# Altium PCB STM Dev board.PcbDoc
Units mil, origin at the board's own origin, x right, y up, seen from the top; angles counter-clockwise.
Board outline 1035 x 1495 mil, 2 copper layers (Top Layer, Bottom Layer); 20 components, 22 nets, 83 pads, 8 vias.
Unrouted connection lines stored in the file: 15.
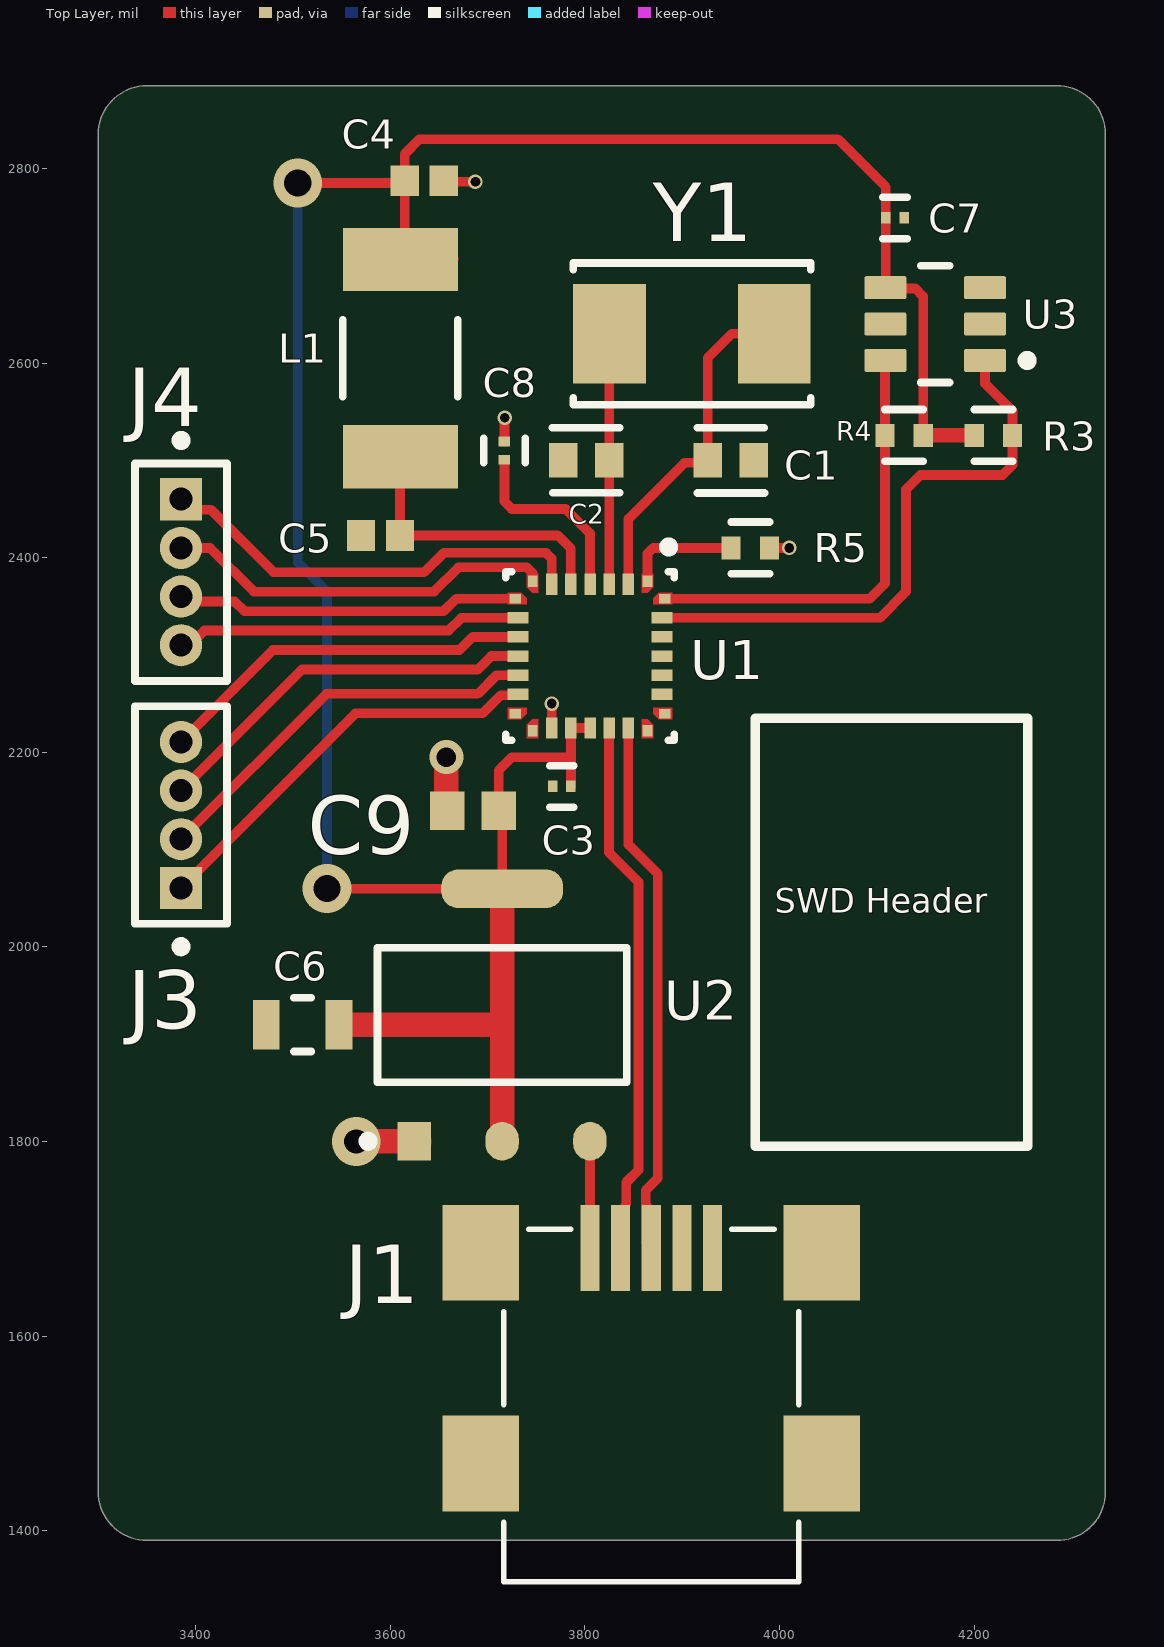
[diagram p0: Top Layer view]
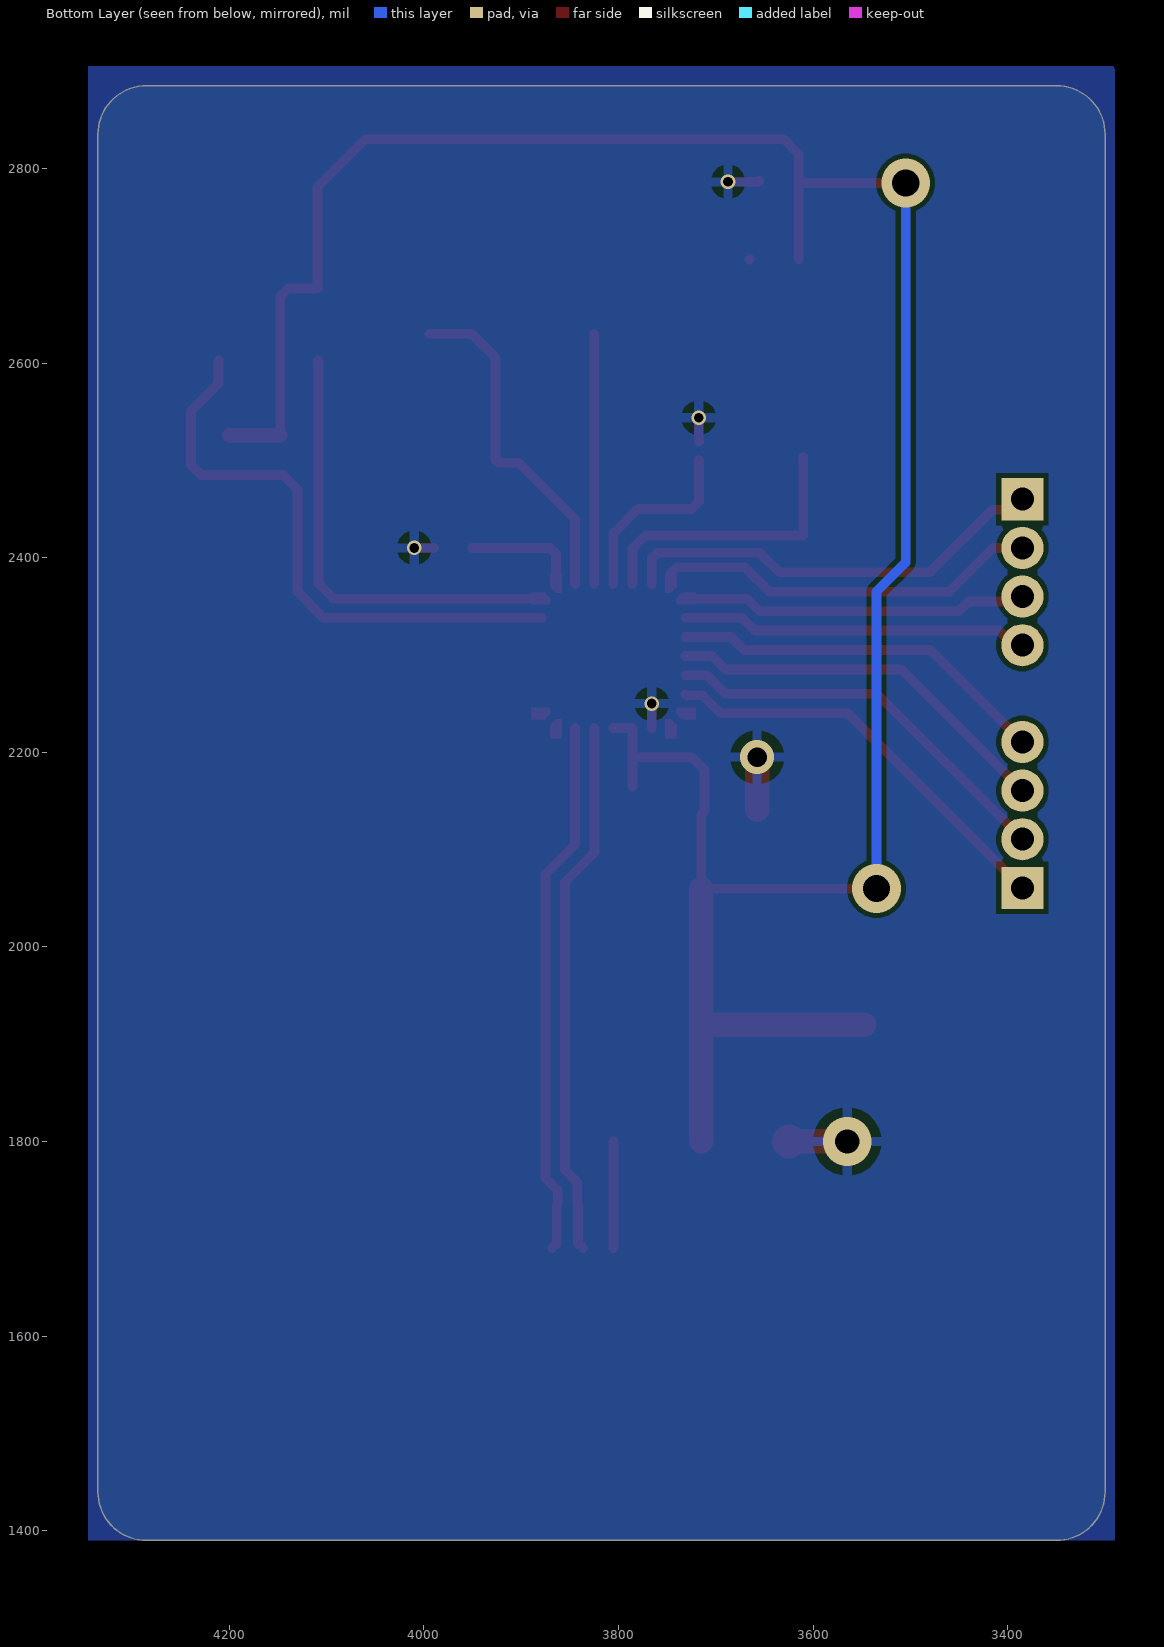
[diagram p1: Bottom Layer view, seen from below]
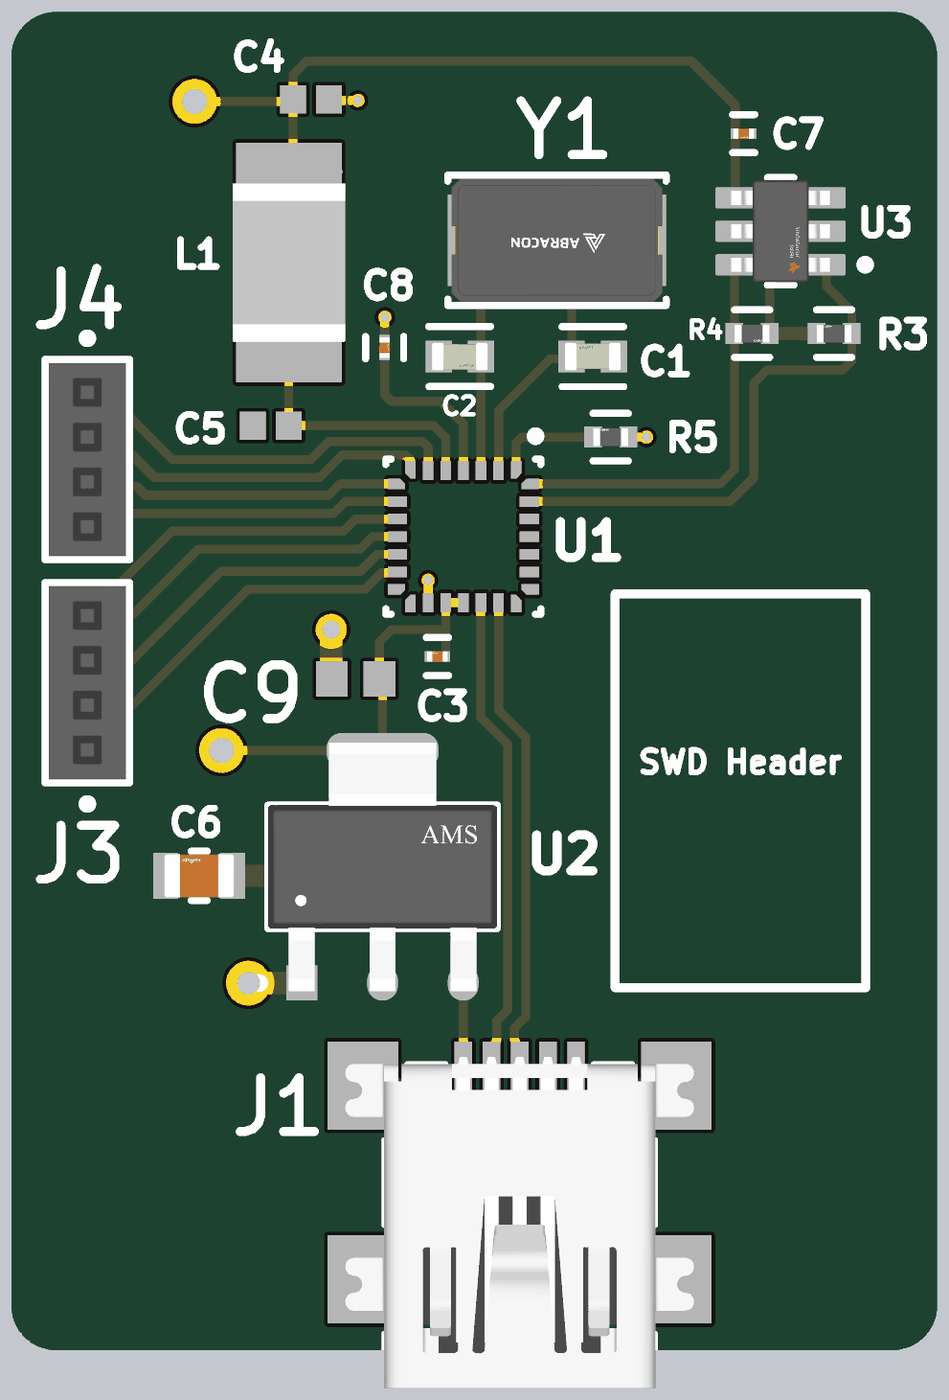
[diagram p2: 3D render of the assembled board from above, using the file's embedded part models]

## Layer stack, top to bottom
Top Solder: solder mask 0.4, Solder Resist, Dk 3.5
Top Layer: signal copper 1.4
Dielectric 1: dielectric 12.6, FR-4, Dk 4.8
Bottom Layer: signal copper 1.4
Bottom Solder: solder mask 0.4, Solder Resist, Dk 3.5

## Board outline
3300,1440 ccw(c3350,1440) 3350,1390 4285,1390 ccw(c4285,1440) 4335,1440 4335,2835 ccw(c4285,2835) 4285,2885 3350,2885 ccw(c3350,2835) 3300,2835

## Design rules (kind name [scope] priority, off if disabled: settings)
Clearance [All] p1: gap=5 ignorepadtopadclearanceinfootprint=TRUE except(10: Arc-Hole Track-Hole SMDPad-Hole THPad-Hole Via-Hole Fill-Hole Poly-Hole Region-Hole Text-Hole)
DiffPairsRouting [All] p1: maxlimit=10 minlimit=6 mostfreqgap=10 toplayer_minwidth=6 toplayer_maxwidth=15 toplayer_prefwidth=15 bottomlayer_minwidth=6 bottomlayer_maxwidth=15 bottomlayer_prefwidth=15 maxuncoupledlength=500
PolygonConnect [All] p1: connectstyle=Relief reliefconductorwidth=10 reliefentries=4 polygonreliefangle="90 Angle" airgapwidth=10
RoutingVias [All] p1: holewidth=28 width=50 viastyle="Through Hole" minholewidth=28 minwidth=50 maxholewidth=28 maxwidth=50
SolderMaskExpansion [All] p1: expansion=4 istentingtop=FALSE
Width [All] p1: maxlimit=40 minlimit=10 preferedwidth=10 minimp=50.000000 maximp=50.000000 favimp=50.000000
29 further rules are at their usual default settings.

## Classes and differential pairs
differential pair USB_D: +USB_D_P -USB_D_N

## Components (designator, comment, footprint, x,y, rotation, side; value= is the part's Value field where it differs from the comment)
C1 "30p" FP-C0603C-CF-MFG 3950,2500 r0 top value="30 pF"
C2 "30p" FP-C0603C-CF-MFG 3801.38,2500 r180 top value="30 pF"
C3 "100n" FP-GRM033-0_03-MFG 3776.33,2164.92 r180 top
C4 "10p" CAPC1006X50X20ML10T10 3635,2787.25 r180 top
C5 "10p" CAPC1006X50X20ML10T10 3590,2422.75 r0 top
C6 "22u" FP-GRM21B-0_15-MFG 3510,1920 r180 top
C7 "100n" FP-GRM033-0_03-MFG 4118.65,2749.06 r0 top
C8 "100n" FP-GRM033-0_03-MFG 3717.34,2510 r90 top
C9 "4u7" CAPC1608X87X35NL15T15 3685,2140 r0 top
J1 "651305142821" 651305142821 3868.27,1528.66 r0 top
J3 "LPPB041NFFN-RC" FP-LPPB041NFFN-RC-MFG 3385,2135.62 r90 top
J4 "LPPB041NFFN-RC" FP-LPPB041NFFN-RC-MFG 3385,2385 r270 top
L1 "120R" SMD-1812 3610.38,2605 r270 top
R3 "5K1" FP-AC0402-MFG 4219.78,2525.66 r180 top
R4 "5K1" FP-AC0402-MFG 4128.01,2525.66 r0 top
R5 "5K1" FP-AC0402-MFG 3970,2410 r180 top
U1 "STM32F042G6U6" STM-UFQFPN28_V 3805.31,2298.82 r270 top
U2 "AMS1117-3.3" FP-AMS1117-IPC_C 3715,1930 r90 top
U3 "TMP100NA/250" FP-DBV0006A-MFG 4160,2640 r180 top
Y1 "32 MHz" FP-ABM7-MFG 3910,2630 r180 top

## Footprints (in the part's own frame and the unit in brackets; to place one, negate y for a bottom-side part, rotate by r counter-clockwise, add the part's x,y. Pads: shape width x height; smd on the part's side, far side on the other; paste and mask are expansions set on the pad)
651305142821 [mm] "Mini USB 2.0 Type AB SMT Horizontal 5 Contacts"
  rect 0.5x2.25 smd: 1(-1.6,4.113) 2(-0.8,4.113) 3(0,4.113) 4(0.8,4.113) 5(1.6,4.113)
  rect 2x2.5 smd: Shell(-4.45,-1.512) Shell(-4.45,3.988) Shell(4.45,-1.512) Shell(4.45,3.988)
  silkscreen extent -3.85,-4.6 3.85,4.6, body extent -4.95,-4.6 4.95,4.8, height 4.1
CAPC1006X50X20ML10T10 [mm] "Chip Capacitor, 2-Leads, Body 1.00x0.55mm, IPC Low Density"
  rect 0.74x0.8 smd: 1(-0.51,0) 2(0.51,0)
  body extent -0.55,-0.33 0.55,0.32, height 0.5
CAPC1608X87X35NL15T15 [mm] "Chip Capacitor, 2-Leads, Body 1.60x0.80mm, IPC Medium Density"
  rect 0.9x1 smd: 1(-0.675,0) 2(0.675,0)
  body extent -0.87,-0.48 0.87,0.47, height 0.87
FP-ABM7-MFG [mm]
  rect 1.9x2.6 smd paste+0 mask+0: 1(-2.15,0) 2(2.15,0)
  silkscreen extent -3.1,-1.85 3.1,1.85, body extent -3.2,-1.95 3.2,1.95, height 0.25
FP-AC0402-MFG [mm]
  rect 0.5x0.6 smd paste+0 mask+0: 1(-0.5,0) 2(0.5,0)
  silkscreen extent -0.5,-0.67 0.5,0.67, body extent -0.85,-0.4 0.85,0.4, height 0.25
FP-AMS1117-IPC_C [mm]
  rect 1.004x0.872 smd paste+0 mask+0: 1(-3.295,2.29)
  rrect100% 1.004x0.872 smd paste+0 mask+0: 2(-3.295,0) 3(-3.295,-2.29)
  rrect87% 1.004x3.182 smd paste+0 mask+0: 4(3.295,0)
  silkscreen extent -3.42,-3.25 1.75,3.62, body extent -3.9,-3.35 3.9,3.35, height 0.25
FP-C0603C-CF-MFG [mm]
  rect 0.75x0.9 smd paste+0 mask+0: 1(-0.6,0) 2(0.6,0)
  silkscreen extent -0.87,-0.85 0.88,0.85, body extent -1.2,-0.6 1.2,0.6, height 0.25
FP-DBV0006A-MFG [mm]
  rrect17% 1.1x0.6 smd paste+0 mask+0: 1(-1.3,0.95) 2(-1.3,0) 3(-1.3,-0.95) 4(1.3,-0.95) 5(1.3,0) 6(1.3,0.95)
  silkscreen extent -2.53,-1.53 0.38,1.53, body extent -1.95,-1.78 1.95,1.78, height 0.25
FP-GRM21B-0_15-MFG [mm]
  rect 0.7x1.3 smd paste+0 mask+0: 1(-0.95,0) 2(0.95,0)
  silkscreen extent -0.23,-0.7 0.23,0.7, body extent -1.4,-0.8 1.4,0.8, height 0.25
FP-GRM033-0_03-MFG [mm]
  rect 0.25x0.3 smd paste+0 mask+0: 1(-0.238,0) 2(0.238,0)
  silkscreen extent -0.32,-0.54 0.32,0.54, body extent -0.46,-0.27 0.46,0.27, height 0.25
FP-LPPB041NFFN-RC-MFG [mm]
  rect 1.1x1.1 hole 0.6 paste-2539.97 mask+0: 1(-1.905,0)
  round 1.1 hole 0.6 paste-2539.97 mask+0: 2(-0.635,0) 3(0.635,0) 4(1.905,0)
  silkscreen extent -3.56,-1.2 2.84,1.2, body extent -2.94,-1.3 2.94,1.3, height 0.25
SMD-1812 [mm] "Chip Inductor, 2-Leads, Body 4.5x3.2mm"
  rect 1.65x3 smd: 1(-2.575,0) 2(2.575,0)
  silkscreen extent -1,-1.5 1,1.5, body extent -2.25,-1.6 2.25,1.6, height 1.49
STM-UFQFPN28_V [mm] "QFN, 28-Leads, Body 4.1x4.1mm, Pitch 0.5mm"
  rect 0.3x0.25 smd: 1(-1.95,1.5) 7(-1.95,-1.5) 15(1.95,-1.5) 21(1.95,1.5)
  rect 0.55x0.3 smd: 2(-1.875,1) 3(-1.875,0.5) 4(-1.875,0) 5(-1.875,-0.5) 6(-1.875,-1) 16(1.875,-1) 17(1.875,-0.5) 18(1.875,0) 19(1.875,0.5) 20(1.875,1)
  rect 0.25x0.3 smd: 8(-1.5,-1.95) 14(1.5,-1.95) 22(1.5,1.95) 28(-1.5,1.95)
  rect 0.3x0.55 smd: 9(-1,-1.875) 10(-0.5,-1.875) 11(0,-1.875) 12(0.5,-1.875) 13(1,-1.875) 23(1,1.875) 24(0.5,1.875) 25(0,1.875) 26(-0.5,1.875) 27(-1,1.875)
  Top Layer region: 1.35,2.15 1.35,1.65 1.505,1.65 1.65,1.795 1.65,2.15
  Top Layer region: 2.15,-1.35 1.65,-1.35 1.65,-1.505 1.795,-1.65 2.15,-1.65
  Top Layer region: -2.15,1.35 -1.65,1.35 -1.65,1.505 -1.795,1.65 -2.15,1.65
  Top Layer region: 2.15,1.35 1.65,1.35 1.65,1.505 1.795,1.65 2.15,1.65
  Top Layer region: 1.35,-2.15 1.35,-1.65 1.505,-1.65 1.65,-1.795 1.65,-2.15
  Top Layer region: -1.35,2.15 -1.35,1.65 -1.505,1.65 -1.65,1.795 -1.65,2.15
  Top Layer region: -1.35,-2.15 -1.35,-1.65 -1.505,-1.65 -1.65,-1.795 -1.65,-2.15
  Top Layer region: -2.15,-1.35 -1.65,-1.35 -1.65,-1.505 -1.795,-1.65 -2.15,-1.65
  silkscreen extent -2.97,-2.2 2.2,2.2, body extent -2.05,-2.05 2.05,2.05, height 0.6

## Part data
C1 C2: library part CMP-1035-00914-3, "CAP CER 30PF 50V 5% NP0 0603", Capacitance="30 pF", Manufacturer=KEMET, Manufacturer Part Number=C0603C300J5GACTU, Package=C0603C-CF, Temperature="-55°C to +125°C", Temperature Characteristic=C0G, Temperature Coefficient=30ppm/°C, Temperature Range High=+125°C, Temperature Range Low=-55°C, Tolerance=0.05, Voltage Rating="50 V", Automotive=Yes, Automotive Grade="Grade 1", Category=Cap, ComponentLink2Description=Datasheet, ComponentLink2URL=https://api.kemet.com/component-edge/download/datasheet/C0603C100J5GACAUTO.pdf, Device Class L1="Passive Components", Device Class L2=Capacitors, Device Class L3="Ceramic Capacitors", Digikey Description="CAP CER 30PF 50V 5% NP0 0603", Height=0.87mm, Lead Free=Yes, Material=Ceramic, Mouser Description="Multilayer Ceramic Capacitors MLCC - SMD/SMT 50volts 30pF C0G 5%", Octopart=https://octopart.com/c0603c300j5gactu-kemet-199455, RoHS=TRUE
C3 C7 C8: library part CMP-06035-000062-2, "Chip Multilayer Ceramic Capacitors for General Purpose, 0201, 0.10uF, X5R, 15%, 10%, 6.3V", Capacitance=100nF, Case Code (Imperial)=0201, Case Code (Metric)=0603, Dielectric=X5R, Max Operating Temperature=85°C, Min Operating Temperature=-55°C, Package Quantity=1, Tolerance=10%, Voltage=6.3V, Case/Package=0201, Depth=0.3mm, Height=0.3mm, Lead Free="Lead Free", Length=0.6mm, Material=Ceramic, Mount="Surface Mount", Packaging="Tape and Reel", Radiation Hardening=No, REACH SVHC="No SVHC", Termination=SMD/SMT, Thickness=0.013inch, Voltage Rating=6.3V, Voltage Rating (DC)=6.3V, Weight=6E-06oz, Width=0.012inch
C4 C5: library part CMP-2008-04829-1, Manufacturer="AVX Interconnect / Elco", Part Number=0402YJ100FBSTR
C6: library part CMP-2007-03385-2, "Chip Multilayer Ceramic Capacitors for General Purpose, 0805, 22uF, X5R, 15%, 20%, 6.3V", Capacitance=22uF, Case Code (Imperial)=0805, Case Code (Metric)=2012, Dielectric=X5R, Max Operating Temperature=85°C, Min Operating Temperature=-55°C, Package Quantity=1, Tolerance=20%, Voltage=6.3V, Case/Package=0805, Depth=1.25mm, Height=1.25mm, Lead Free="Lead Free", Length=2mm, Material=Ceramic, Mount="Surface Mount", Packaging="Tape and Reel", Radiation Hardening=No, REACH SVHC="No SVHC", Termination=SMD/SMT, Thickness=0.053inch, Voltage Rating=6.3V, Voltage Rating (DC)=6.3V, Width=0.049inch
C9: library part CMP-2006-03238-1, Manufacturer=Kemet, Part Number=C0603C475K8PACTU
J1: library part CMP-1502-03247-2, Contact Resistance=20mΩ, Current Rating=1A, Insulation Resistance=1GΩ, Max Operating Temperature=105°C, Min Operating Temperature=-40°C, Operating Supply Voltage=30V, Connector Type=USB, Contact Material=Copper, Contact Plating=Gold, Features=Shielded, Gender=Receptacle, Lead Free="Lead Free", Mount="Horizontal, Surface Mount", NexarPartId=19991175, Number of Contacts=5, Number of Pins=5, Orientation=Horizontal, Packaging="Tape and Reel", REACH SVHC=Unknown, RoHS=Compliant, Termination=SMD/SMT, USB Standard="USB 2.0"
J3 J4: library part CMP-25680-000035-1, "CONN HDR 4POS 0.05 GOLD PCB", Package Quantity=1, Connector Type=Header, Contact Plating=Gold, Contact Type="Female Socket", Lead Free="Lead Free", Mount="Through Hole", Number of Positions=4, Number of Rows=1, Packaging=Bulk, Pitch=0.05inch, RoHS Compliant=Yes, Termination=Solder
L1: library part CMP-0220-00088-1, "SMD EMI Suppression Ferrite Bead WE-CBF, Z = 120 Ohm", ComponentLink1Description="Manufacturer Link", ComponentLink1URL=http://www.we-online.com, ComponentLink2Description=Datasheet, ComponentLink2URL=http://www.we-online.de/katalog/media/pdf/7427925.pdf, DatasheetVersion=Dec-2005, Impedance="120 Ohm", PackageDescription="Chip Inductor, 2-Leads, Body 4.5 x 3.2 mm", PackageReference=SMD-1812, PackageVersion=2010
R3 R4 R5: library part CMP-2002-01829-3, "RES 5.1kΩ ±1% 0.063W 0402", Case Code (Imperial)=0402, Case Code (Metric)=1005, Max Operating Temperature=155°C, Max Power Dissipation=63mW, Min Operating Temperature=-55°C, Resistance=5.1kR, Resistor Type="Thick Film", Temperature Coefficient=100ppm/°C, Tolerance=1%, Case/Package=0402, Depth=0.5mm, Features="Moisture Resistant", Height=0.015inch, Lead Free="Lead Free", Length=0.039inch, Military Standard=Not, Mount="Surface Mount", Number of Terminations=2, Packaging="Cut Tape", Power Rating=63mW, RoHS Compliant=Yes, Series=AC, Size Code=0402, Width=0.02inch
U1: library part CMP-0304-00112-2, "ARM Cortex-M0 32-bit MCU, 32 KB Flash, 6 KB Internal RAM, 24 I/Os, 28-Pin UFQFPN, -40 to 85 degC, Tray", I/Os (High Current)=24, Manufacturer=STMicroelectronics, Operating Frequency(F) (Processor speed) (MHz)=48, Package Description="28-Pin Ultra Thin Fine Pitch Quad Flat No-Lead, 4 x 4 x 0.6 mm Body, 0.5 mm Pitch", Package Reference=UFQFPN28, Supply Voltage(Vcc) min (V)=2, ComponentLink1Description="Manufacturer URL", ComponentLink1URL=http://www.st.com/, ComponentLink2Description=Datasheet, ComponentLink2URL=http://www.st.com/st-web-ui/static/active/en/resource/technical/document/datasheet/DM00105814.pdf, Core="ARM Cortex-M0", DatasheetVersion="Rev. 5", FLASH Size (Prog) (kB)=32, Internal RAM Size (kB)=6, Mounting Technology="Surface Mount", Packing=Tray, PartNumber=STM32F042G6U6
U2: library part CMP-209535-000001-1, "LDO Voltage Regulators 1A, 3.3V", Dropout Voltage=1.1V, Manufacturer="Advanced Monolithic Systems", Max Junction Temp=+125°C, Max Power Dissipation=1.2W, Max Supply Voltage=15V, Nominal Supply Current=5mA, Output Current=1A, Output Voltage=3.3V, Package=AMS1117, Temperature="-40°C to +125°C", Temperature Range Low=-40°C, Automotive=No, Category=IC, ComponentLink2Description=Datasheet, ComponentLink2URL=http://www.advanced-monolithic.com/pdf/ds1117.pdf, Device Class L1="Integrated Circuits (ICs)", Device Class L2="Power Management ICs", Device Class L3="Voltage Regulators - Linear", Height=1.8mm, Ipc Land Pattern Name=SOT229P700X180-4, Lead Free=Yes, Manufacturer Part Number=AMS1117-3.3, Number Of Outputs=1, Octopart=https://octopart.com/ams1117-3.3-advanced+monolithic+systems-25899300, Output Type=Fixed, RoHS=TRUE, Standoff Height=0.64mm, Temperature Range High=+125°C
U3: library part CMP-04948-000008-1, "SENSOR DIGITAL -55C-125C SOT23-6", Ambient Temperature Range High=+125°C, Ambient Temperature Range Low=-55°C, Manufacturer="Texas Instruments", Max Junction Temp=+150°C, Max Supply Voltage=5.5V, Min Supply Voltage=2.7V, Operating Supply Current=45-150uA, Package=DBV0006A, Temperature="-55°C to +125°C", Automotive=No, Category=IC, ComponentLink2Description=Datasheet, ComponentLink2URL=http://www.ti.com/lit/ds/symlink/tmp100.pdf, Device Class L1=Sensors, Device Class L2="Temperature and Humidity Sensors", Device Class L3=unset, Digikey Description="SENSOR DIGITAL -55C-125C SOT23-6", Height=1.45mm, Interface=I2C,2-Wire,SMBus, Ipc Land Pattern Name=SOT95P280X145-6, Lead Free=Yes, Manufacturer Part Number=TMP100NA/250, Mouser Description="TEXAS INSTRUMENTS - TMP100NA/250 - IC, TEMPERATURE SENSOR", Octopart=https://octopart.com/tmp100na%2F250-texas+instruments-515369, Resolution=12bits, RoHS=TRUE, Sensor Output=I2C,SMBus, Standoff Height=0mm, Temperature Range High=+125°C, Temperature Range Low=-55°C
Y1: library part CMP-27762-013665-1, "Crystal 32MHz ±20ppm 18pF SMD-2 6mm x 3.5mm", Case/Package=CSMD, ESR (Equivalent Series Resistance)=50R, Frequency=32MHz, Frequency Stability=30ppm, Frequency Tolerance=20ppm, Load Capacitance=18pF, Max Operating Temperature=85°C, Min Operating Temperature=-40°C, Package Quantity=1000, Resistor Type=Ceramic, Depth=3.5mm, Height=0.055inch, Lead Free="Lead Free", Length=6mm, Mount="Surface Mount", Number of Pins=2, Operating Frequency="32 MHz", Packaging="Tape and Reel", Radiation Hardening=No, Series=ABM7, Series Resistance=50R, Termination=SMD/SMT, Tolerance=20ppm, Width=3.3mm

## Via types
v1: diameter 15, hole 10, Top Layer to Bottom Layer, 4 vias
v2: diameter 50, hole 28, Top Layer to Bottom Layer, 2 vias
v3: diameter 50, hole 25, Top Layer to Bottom Layer, 1 vias
v4: diameter 35, hole 20, Top Layer to Bottom Layer, 1 vias

## Nets (pads, with @x,y where several pads share a name; then routed paths per layer and width w, separated by ;. In a path a pad name is that pad's centre, name@x,y a point inside that pad or via, vN(x,y) a via of type N, cw(c..) or ccw(c..) an arc to the next point about the centre after c; other vN are vias at no path point)
+3V3: C3.1 C4.2 C6.1 C7.1 C9.2 L1.1 R3.2 R4.2 U1.17 U1.18 U2.2 U2.4 U3.4 | length 2709.3
  Top Layer w10: v2(3505,2785) 3612.67,2785 C4.2 ; v2(3535,2060) 3535.28,2059.72 U2.4 3715,2136.57 C9.2 3711.57,2181.57 3724.96,2194.96 3785.65,2194.96 ; L1.1@3614.92,2706.84 C4.2 ; L1.1@3664.92,2706.84 L1.1@3665.38,2706.38 ; C3.1 3785.65,2194.96 ; C3.1 C3.1@3785.76,2165 ; U1.18 U1.17 3785.65,2194.96 ; R4.2 4147.69,2668.56 4139.61,2676.64 4109.58,2676.64 U3.4 4109.3,2677.88 C7.1 4109.3,2780.7 4060,2830 3630,2830 3614.92,2814.92 C4.2
  Top Layer w15: R4.2 R3.2
  Top Layer w25: C6.1 3715,1920 ; U2.2 3715,1920 ; U2.4 3715,1920
  Bottom Layer w10: v2(3505,2785) 3505,2395 3535,2365 v2(3535,2060)
+3V3A: C5.2 L1.2 U1.5 | length 298.8
  Top Layer w10: L1.2 3610.08,2503.32 C5.2 3772.25,2422.75 3785.63,2409.37 U1.5
+VBUS: J1.1 U2.3 | length 109.8
  Top Layer w10: U2.3 3805.22,1800.22 3805.22,1690.62 J1.1
BOOT0: R5.2 U1.1 | length 116.9
  Top Layer w10: U1.1 3864.37,2404.14 3870.23,2410 R5.2
GND: C1.2 C2.2 C3.2 C4.1 C5.1 C6.2 C7.2 C8.2 C9.1 J1.5 R5.1 U1.16 U2.1 U3.2 U3.3 U3.5 | length 218.6
  Top Layer w10: U2.1 U2.1@3625,1800.12 ; C4.1 3656.21,2786.13 v1(3687.52,2786.13) ; C9.1@3657.62,2140.81 C9.1 ; C8.2 3717.4,2519.35 3717.48,2519.43 3717.48,2543.71 v1(3717.61,2543.85) ; U1.16 v1(3765.94,2250) ; R5.1 v1(4010,2410)
  Top Layer w25: v3(3565,1800) 3565.14,1800.14 3624.82,1800.14 U2.1@3624.92,1800.04 ; C9.1@3657.62,2140.81 v4(3657.62,2195)
  Top Layer w35: U2.1@3624.92,1800.04 U2.1@3625,1800.12
I2C1_SCL: R3.1 U1.27 U3.1 | length 605.9
  Top Layer w10: U1.27 4103.19,2338.19 4130,2365 4130,2470 4145,2485 4229.14,2485 4239.46,2495.32 R3.1 4239.46,2550.54 4211.18,2578.82 U3.1
I2C1_SDA: R4.1 U1.28 U3.6 | length 462.1
  Top Layer w10: U1.28 4092.87,2357.87 4108.32,2373.32 R4.1 4108.32,2602.1 U3.6
MCU_PA0: J4.1 U1.6 | length 449.2
  Top Layer w10: J4.1 3395.8,2449.2 3415.8,2449.2 3480,2385 3635,2385 3655,2405 3760,2405 3765.94,2399.06 U1.6
MCU_PA1: J4.2 U1.7 | length 401.2
  Top Layer w10: J4.2 3415,2410 3460,2365 3645,2365 3670,2390 3740.32,2390 3746.18,2384.14 3746.18,2375.67 U1.7
MCU_PA2: J4.3 U1.8 | length 355.1
  Top Layer w10: J4.3 3390,2355 3440,2355 3450,2345 3655,2345 3667.87,2357.87 U1.8
MCU_PA3: J4.4 U1.9 | length 358.2
  Top Layer w10: J4.4 3394.01,2310 3409.01,2325 3660,2325 3673.19,2338.19 U1.9
MCU_PA4: J3.4 U1.10 | length 391.2
  Top Layer w10: J3.4 3479.38,2305 3671.21,2305 3684.72,2318.5 U1.10
MCU_PA5: J3.3 U1.11 | length 403.7
  Top Layer w10: J3.3 3509.38,2285 3690,2285 3703.82,2298.82 U1.11
MCU_PA6: J3.2 U1.12 | length 416.3
  Top Layer w10: J3.2 3534.38,2260 3690,2260 3709.13,2279.13 U1.12
MCU_PA7: J3.1 U1.13 | length 428.9
  Top Layer w10: J3.1 3564.38,2240 3695,2240 3713.54,2258.54 3730.59,2258.54 U1.13
NRST: C8.1 U1.4 | length 196.9
  Top Layer w10: C8.1 3717.34,2457.66 3725,2450 3780.31,2450 3805.31,2425 U1.4
OSC_IN: C1.1 U1.2 Y1.1 | length 357.7
  Top Layer w10: U1.2 3844.68,2439.68 3902.47,2497.47 3923.85,2497.47 C1.1 3926.38,2605.52 3950.86,2630 Y1.1
OSC_OUT: C2.1 U1.3 Y1.2 | length 257.5
  Top Layer w10: U1.3 C2.1 3825,2629.65 Y1.2
SWCLK: U1.22
SWDIO: U1.21
USB_D_N: J1.2 U1.19 | length 554.7
  Top Layer w10: U1.19 3824.68,2224.68 3824.68,2097.03 3855,2066.72 3855,1770.62 3842.52,1758.14 3842.52,1735.71 3841.61,1734.81 3841.61,1695.41 J1.2
USB_D_P: J1.3 U1.20 | length 554.5
  Top Layer w10: U1.20 3844.68,2105.32 3875,2075 3875,1762.34 3862.52,1749.86 3862.52,1735.71 3863.42,1734.81 3863.42,1695.41 J1.3
pads on no net: J1.4 J1.Shell U1.14 U1.15 U1.23 U1.24 U1.25 U1.26

## Polygon pours and split planes (outlines as drawn)
GND on Bottom Layer "GND_L02_P000" (solid, pour order 0): 3290,1390 3290,2900 3285,2905 4345,2905 4345,1390

## Silkscreen, mask and mechanical layers (free items; w line width, h text height)
Top Overlay:
  lines w10: 3975,1795 4255,1795 4255,2235 3975,2235 3975,1795
  text "SWD Header" at 3995,2035 h25
Mechanical 1:
  lines w10: 3300,1440 ccw(c3350,1440) 3350,1390 3510,1390 4285,1390 ccw(c4285,1440) 4335,1440 4335,2835 ccw(c4285,2835) 4285,2885 3350,2885 ccw(c3350,2835) 3300,2835 3300,1440